# Altium PCB TinyCAN.PcbDoc
Units mil, origin at the board's own origin, x right, y up, seen from the top; angles counter-clockwise.
Board outline 1141.03 x 566.03 mil, 4 copper layers (Top Layer, Layer 1, Layer 2, Bottom Layer), stack 23.756 mil thick; 43 components, 27 nets, 167 pads, 68 vias.
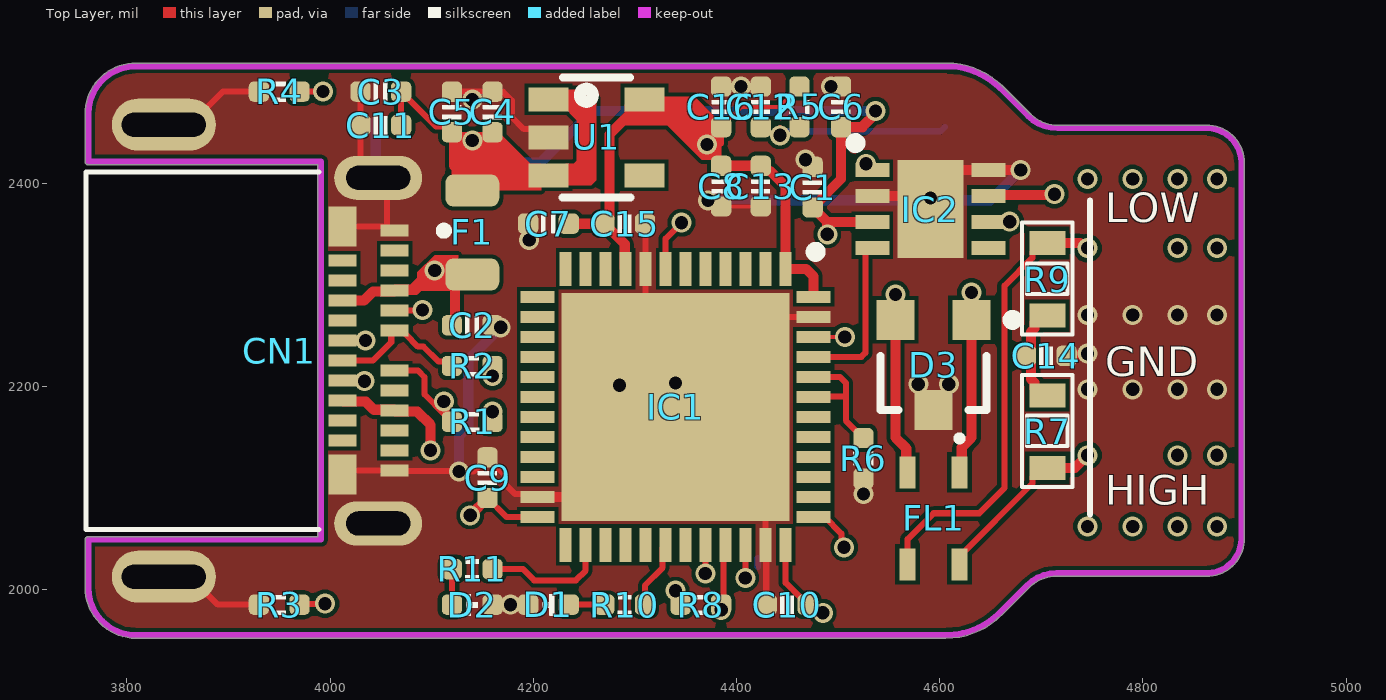
[diagram p0: Top Layer view]
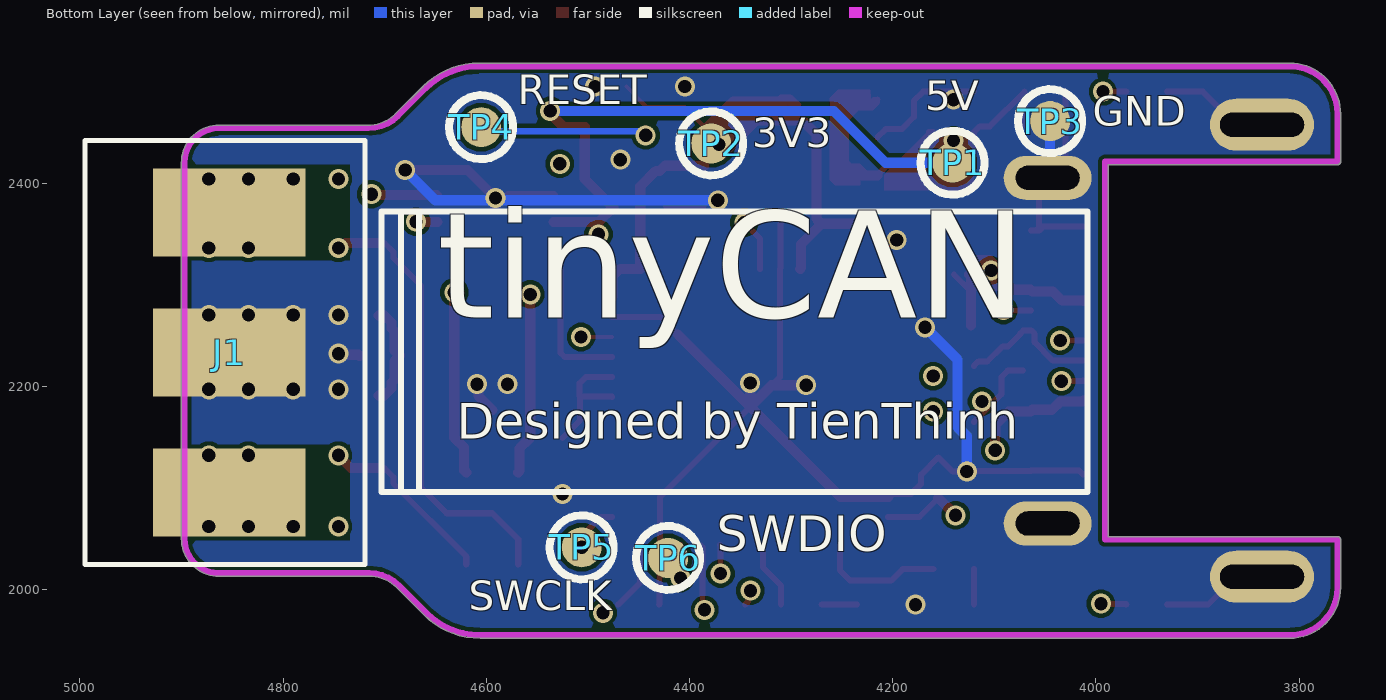
[diagram p1: Bottom Layer view, seen from below]
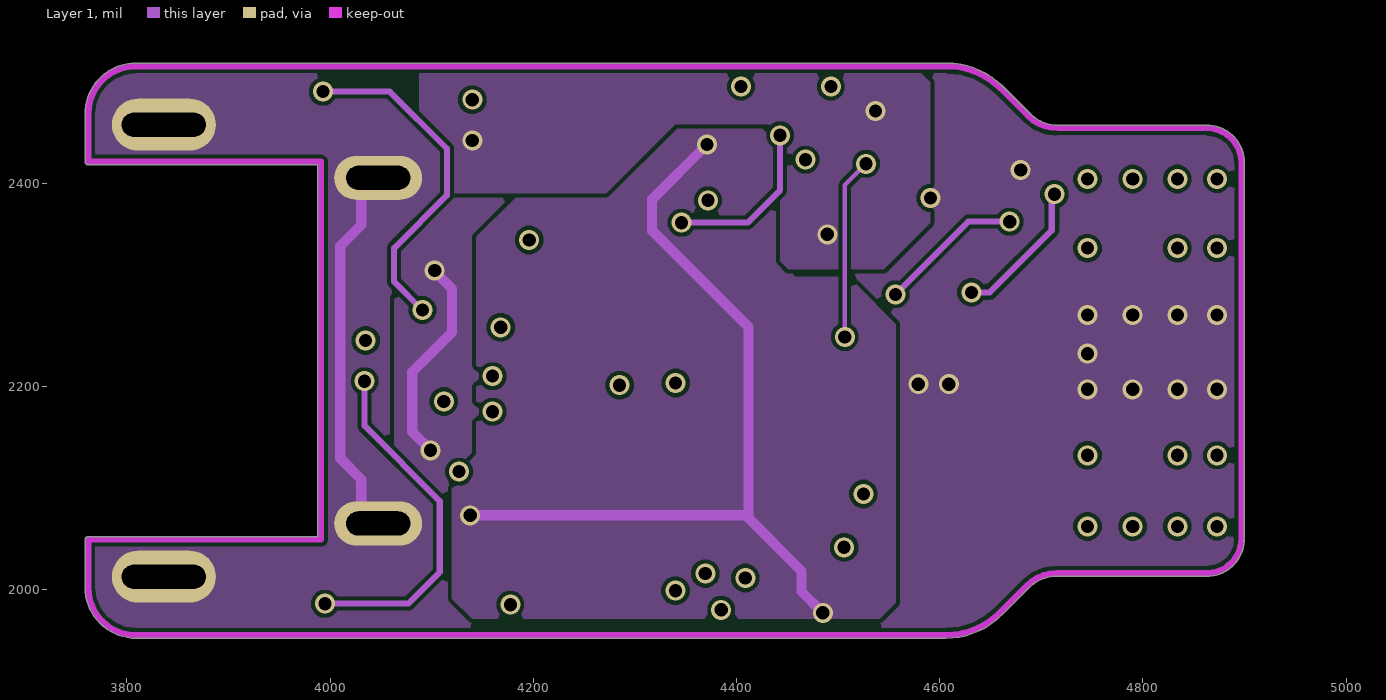
[diagram p2: Layer 1]
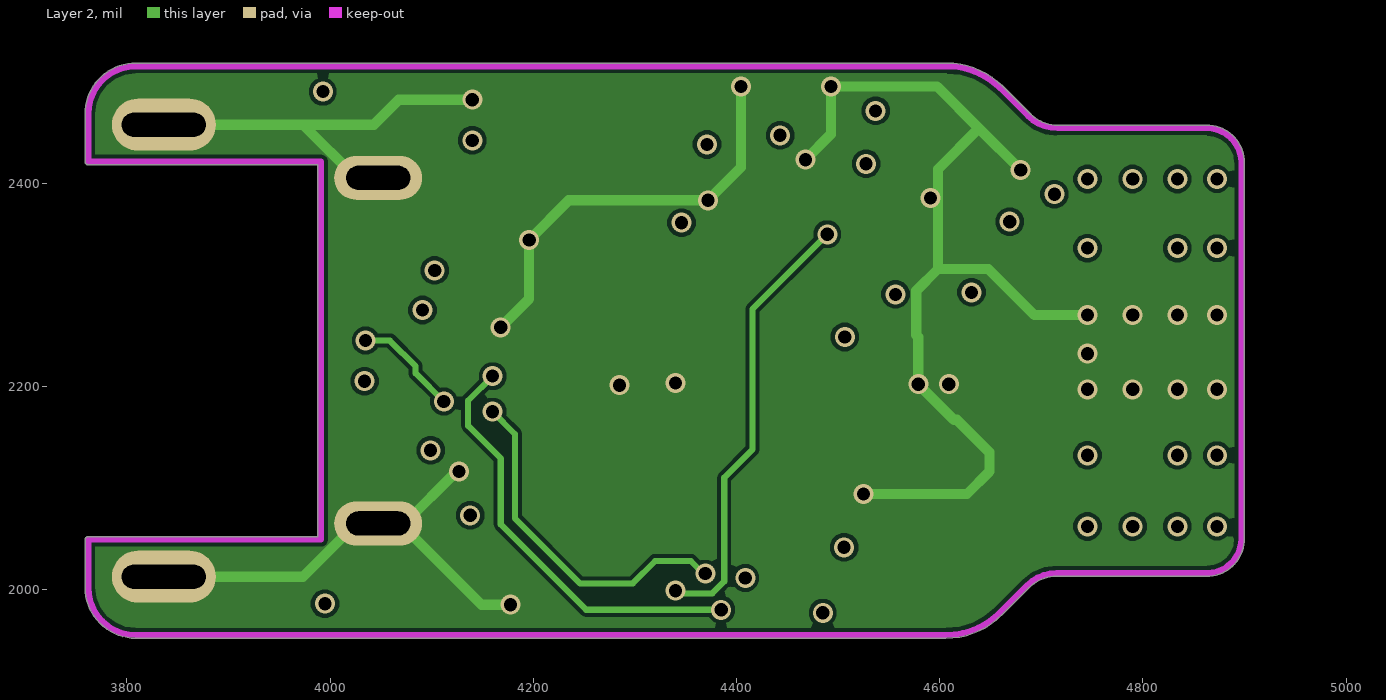
[diagram p3: Layer 2]
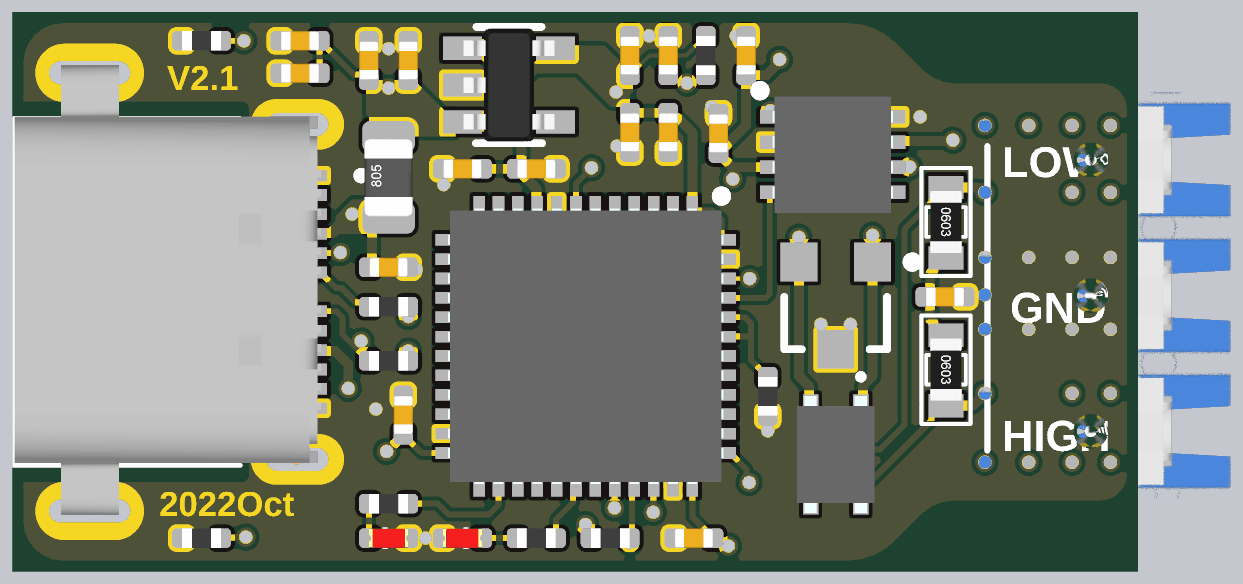
[diagram p4: 3D render of the assembled board from above, using the file's embedded part models]

## Layer stack, top to bottom
Top Solder: solder mask 0.4, Solder Resist, Dk 3.5
Top Layer: signal copper 1.4
Dielectric 2: prepreg 2.8, PP-006, Dk 4.1
Layer 1: signal copper 1.378
Dielectric 1: dielectric 12.6, FR-4, Dk 4.8
Layer 2: signal copper 1.378
Dielectric 3: prepreg 2.8, PP-006, Dk 4.1
Bottom Layer: signal copper 1.4
Bottom Solder: solder mask 0.4, Solder Resist, Dk 3.5

## Board outline
3758.99,2002 ccw(c3809,2002) 3808.97,1951.98 3827,1951.98 3809,1951.98 4606,1951.98 ccw(c4606,2029.84) 4661.05,1974.79 4688.13,2001.87 cw(c4714.97,1975.03) 4714.97,2012.98 4863,2012.98 ccw(c4863,2050) 4900.02,2050 4900.02,2420 ccw(c4863,2420) 4863,2457.01 4715.97,2457.01 cw(c4715.97,2494.97) 4689.13,2468.13 4662.05,2495.21 ccw(c4607,2440.16) 4607,2518.01 3827.02,2518.01 3809,2518.01 ccw(c3809,2468) 3758.99,2468 3758.99,2421 ccw(c3762,2421) 3762,2417.99 3987.99,2417.99 3987.99,2052.01 3762,2052.01 ccw(c3762,2049) 3758.99,2049

## Design rules (kind name [scope] priority, off if disabled: settings)
Clearance [All] p1: gap=4 ignorepadtopadclearanceinfootprint=FALSE
PlaneConnect [All] p1: planeconnectstyle=Direct reliefexpansion=20 reliefentries=4 reliefconductorwidth=10 reliefairgap=10
PolygonConnect [All] p1: connectstyle=Direct reliefconductorwidth=10 reliefentries=4 polygonreliefangle="90 Angle" airgapwidth=10
RoutingVias [All] p1: holewidth=12.99 width=19.68 viastyle="Through Hole" minholewidth=12.99 minwidth=19.68 maxholewidth=12.99 maxwidth=19.68
SolderMaskExpansion [All] p1: expansion=4 istentingtop=FALSE
Width [All] p1: maxlimit=10 minlimit=4 preferedwidth=6
29 further rules are at their usual default settings.

## Classes and differential pairs
component class TinyCAN: C1 C2 C3 C4 C5 C6 C7 C8 C9 C10 C16 CN1 D1 F1 FL1 IC1 IC2 J1 R1 R2 R3 R4 R5 R6 R7 R8 R9 R10 R11 TP1 TP2 TP3 TP4 TP5 U1

## Components (designator, comment, footprint, x,y, rotation, side; value= is the part's Value field where it differs from the comment)
C1 "104" CAP_0402 4475,2396 r90 top value=103
C2 "104" CAP_0402 4140,2260 r0 top value=103
C3 "105" CAP_0402 4050,2490 r0 top value=103
C4 "105" CAP_0402 4160,2470 r270 top value=103
C5 "105" CAP_0402 4120,2470 r270 top value=103
C6 "105" CAP_0402 4503,2475 r270 top value=103
C7 "105" CAP_0402 4215,2360 r0 top value=103
C8 "105" CAP_0402 4385,2397 r90 top value=103
C9 "104" CAP_0402 4155,2110 r90 top value=103
C10 "104" CAP_0402 4450,1985 r180 top value=103
C11 "104" CAP_0402 4050,2457 r180 top value=103
C12 "104" CAP_0402 4424,2475 r90 top value=103
C13 "104" CAP_0402 4424,2397 r270 top value=103
C14 "4.7nF" CAP_0402 4705,2230 r180 top value=103
C15 "104" CAP_0402 4290,2360 r0 top value=103
C16 "104" CAP_0402 4385,2475 r90 top value=103
CN1 "USB CONT" MOLEX_1054550101 3950,2235 r270 top locked
D1 "color?" LED_0402_RED 4215,1985 r180 top
D2 "color?" LED_0402_RED 4140,1985 r0 top
D3 "PESD1CAN,215" SOT23-3 4594,2221 r180 top
F1 "Fuse" RES-SMD-0805-Clean 4140,2355 r90 top
FL1 "ACM2520-301" ACM25203012P 4594,2070 r270 top
IC1 "STM32F072CBU6" QFN50P700X700X60-49N-D 4340.17,2179.73 r270 top
IC2 "TJA1044VTKZ" SON65P300X300X100-9N 4590.91,2374.39 r0 top
J1 "KF3" KF3-3.5 4853,2233.2 r270 bottom
R1 "22R" RES_0402 4140,2165 r0 top
R2 "22R" RES_0402 4140,2220 r0 top
R3 "5K1" RES_0402 3950,1985 r180 top
R4 "5K1" RES_0402 3950,2490 r180 top
R5 "10k" RES_0402 4462,2475 r270 top
R6 "10k" RES_0402 4525,2129 r270 top
R7 "60R" RES-SMD-0603 4706,2156 r270 top
R8 "10k" RES_0402 4365,1985 r180 top
R9 "60R" RES-SMD-0603 4706,2306 r270 top
R10 "1K" RES_0402 4290,1985 r180 top
R11 "1K" RES_0402 4140,2020 r180 top
TP1 "TP 1mm" "SMT Test Point" 4141,2420 r90 bottom
TP2 "TP 1mm" "SMT Test Point" 4378.5,2439 r90 bottom
TP3 "TP 1mm" "SMT Test Point" 4045,2461 r90 bottom
TP4 "TP 1mm" "SMT Test Point" 4605,2455 r90 bottom
TP5 "TP 1mm" "SMT Test Point" 4506,2041.46 r90 bottom
TP6 "TP 1mm" "SMT Test Point" 4421,2031 r90 bottom
U1 "XC6209F332" SOT23-5 4262.24,2445 r270 top

## Footprints (in the part's own frame and the unit in brackets; to place one, negate y for a bottom-side part, rotate by r counter-clockwise, add the part's x,y. Pads: shape width x height; smd on the part's side, far side on the other; paste and mask are expansions set on the pad)
ACM25203012P [mm]
  rect 0.8x0.4 smd: 1(-1.15,0.65) 2(-1.15,-0.65) 3(1.15,-0.65) 4(1.15,0.65)
  silkscreen extent -2.05,0.6 -1.95,0.7, body extent -1.51,-1 1.51,1, height 1.4
CAP_0402 [mil]
  rrect50% 20x20 smd: 1(-20,0) 2(20,0)
  silkscreen extent -7,-9 7,9, body extent -20,-10 20,10, height 20
KF3-3.5 [mm] "3,50mm - modular - blue - Horizontal wire entry - Pressure clamp - 8,4mm height - 03p"
  rect 2.2x3.81 smd: 1(-3.5,0) 2(0,0) 3(3.5,0)
  silkscreen extent -5.3,-3.6 5.3,3.4, body extent -5.7,-3.6 5.8,3.4, height 8.41
LED_0402_RED [mil]
  rrect50% 20x20 smd: 1(-20,0) 2(20,0)
  silkscreen extent -6,-10 6,10, body extent -20,-10 20,10, height 18
MOLEX_1054550101 [mm]
  rect 0.3x0.7 smd: A1(-3,2.885) A2(-2.5,2.885) A3(-2,2.885) A4(-1.5,2.885) A5(-1,2.885) A6(-0.5,2.885) A7(0.5,2.885) A8(1,2.885) A9(1.5,2.885) A10(2,2.885) A11(2.5,2.885) A12(3,2.885) B2(2.25,1.585) B3(1.75,1.585) B4(1.25,1.585) B5(0.75,1.585) B6(0.25,1.585) B7(-0.25,1.585) B8(-0.75,1.585) B9(-1.25,1.585) B10(-1.75,1.585) B11(-2.25,1.585)
  rect 1x0.7 smd: B1(3.1,1.585) B12(-3.1,1.585)
  oval 1.1x2.2 hole 0.6 slot 1.6 at 90 deg: S1(-4.32,2.475) S2(4.32,2.475)
  oval 1.3x2.6 hole 0.6 slot 2.1 at 90 deg: S3(-5.65,-2.885) S4(5.65,-2.885)
  silkscreen extent -4.47,-4.83 4.47,4.22, body extent -5.85,-4.82 5.75,3.08, height 2.22
QFN50P700X700X60-49N-D [mm]
  rect 0.85x0.3 smd: 1(-3.45,2.75) 2(-3.45,2.25) 3(-3.45,1.75) 4(-3.45,1.25) 5(-3.45,0.75) 6(-3.45,0.25) 7(-3.45,-0.25) 8(-3.45,-0.75) 9(-3.45,-1.25) 10(-3.45,-1.75) 11(-3.45,-2.25) 12(-3.45,-2.75) 25(3.45,-2.75) 26(3.45,-2.25) 27(3.45,-1.75) 28(3.45,-1.25) 29(3.45,-0.75) 30(3.45,-0.25) 31(3.45,0.25) 32(3.45,0.75) 33(3.45,1.25) 34(3.45,1.75) 35(3.45,2.25) 36(3.45,2.75)
  rect 0.3x0.85 smd: 13(-2.75,-3.45) 14(-2.25,-3.45) 15(-1.75,-3.45) 16(-1.25,-3.45) 17(-0.75,-3.45) 18(-0.25,-3.45) 19(0.25,-3.45) 20(0.75,-3.45) 21(1.25,-3.45) 22(1.75,-3.45) 23(2.25,-3.45) 24(2.75,-3.45) 37(2.75,3.45) 38(2.25,3.45) 39(1.75,3.45) 40(1.25,3.45) 41(0.75,3.45) 42(0.25,3.45) 43(-0.25,3.45) 44(-0.75,3.45) 45(-1.25,3.45) 46(-1.75,3.45) 47(-2.25,3.45) 48(-2.75,3.45)
  rect 5.7x5.7 smd: 49(0,0)
  silkscreen extent -4,3.38 -3.75,3.63, body extent -3.55,-3.55 3.55,3.55, height 0.6
RES-SMD-0603 [mm]
  rect 0.6x0.9 smd: 1(-0.889,0) 2(0.927,0)
  silkscreen extent -1.4,-0.64 1.4,0.64, body extent -0.8,-0.4 0.8,0.4, height 0.43
RES-SMD-0805-Clean [mm]
  rrect50% 0.8x1.35 smd: 1(-1.143,0) 2(0.957,0)
  body extent -1.1,-0.62 0.9,0.63, height 0.8
RES_0402 [mil]
  rrect50% 20x20 smd: 1(-20,0) 2(20,0)
  silkscreen extent -6,-10 6,10, body extent -20,-10 20,10, height 14
"SMT Test Point" [mm]
  round 1 smd paste-0.5: 1(0,0)
  silkscreen extent -0.8,-0.8 0.8,0.8, body extent -0.5,-0.5 0.5,0.5, height 0.1
SON65P300X300X100-9N [mm]
  rect 0.85x0.35 smd: 1(-1.45,0.975) 2(-1.45,0.325) 3(-1.45,-0.325) 4(-1.45,-0.975) 5(1.45,-0.975) 6(1.45,-0.325) 7(1.45,0.325) 8(1.45,0.975)
  rect 1.65x2.45 smd: 9(0,0)
  silkscreen extent -2,1.53 -1.75,1.77, body extent -1.55,-1.5 1.55,1.5, height 1
SOT23-3 [mm]
  rect 0.95x1 smd: 1(-0.95,-1.125) 2(0.95,-1.125) 3(0,1.125)
  silkscreen extent -2.1,-1.25 1.32,1.13, body extent -1.45,-0.65 1.45,0.65, height 1
SOT23-5 [mm]
  rect 0.6x1 smd: 1(-0.95,-1.2) 2(0,-1.2) 3(0.95,-1.2) 4(0.95,1.2) 5(-0.95,1.2)
  silkscreen extent -1.5,-0.85 1.5,0.85, body extent -1.46,-1.17 1.46,1.17, height 1

## Part data
C1 C2 C3 C4 C5 C6 C7 C8 C9 C10 C11 C12 C13 C14 C15 C16: library part CM, "Cap SMD"
CN1: library part 1054550101, "CONN RCP USB3.1 TYPEC 24P SMD RA", Manufacturer=Molex, Package=None, PART NUMBER=WM17904TR-ND, Availability=Unavailable, Gender=Receptacle, MF=Molex, MPN=1054550101, Price=None
D1 D2: library part LED_0402, "LED", Type=0402
D3: library part PESD5V0S2BT,215, "TVS DIODE 5V 14V SOT23", Manufacturer="Nexperia USA Inc.", Created by=eteofilo, Creation date=17-Apr-2018, Manufacturer part #=PESD5V0S2BT,215
F1: library part FUSE
FL1: library part ACM2520-301-2PL-TL01_1, "Common Mode Filters", Arrow Part Number=ACM9070-701-2PL-TL01, Manufacturer_Name=TDK, Mouser Part Number=810-ACM90707012PLTL, Arrow Price/Stock=https://www.arrow.com/en/products/acm9070-701-2pl-tl01/tdk, Datasheet Link=http://www.mouser.com/ds/2/400/e9713_acm-16715.pdf, Height=4.5mm, Manufacturer_Part_Number=ACM9070-701-2PL-TL01, Mouser Price/Stock=https://www.mouser.co.uk/ProductDetail/TDK/ACM9070-701-2PL-TL01?qs=vGA93s6UehfkQlsVzBqdDg%3D%3D
IC1: "Integrated Circuit", Manufacturer_Name=STMicroelectronics, Mouser Part Number=511-STM32F072CBU6, Arrow Part Number=STM32F072CBU6, Arrow Price/Stock=https://www.arrow.com/en/products/stm32f072cbu6/stmicroelectronics, Datasheet Link=https://www.mouser.com/datasheet/2/389/stm32f072c8-956183.pdf, Height=0.6mm, Manufacturer_Part_Number=STM32F072CBU6, Mouser Price/Stock=https://www.mouser.co.uk/ProductDetail/STMicroelectronics/STM32F072CBU6?qs=xf9JV0PLFEfAjCpxuEsnYA%3D%3D
IC2: "Integrated Circuit", Manufacturer_Name=NXP, Mouser Part Number=771-TJA1044VTKZ, Arrow Part Number=TJA1044VTKZ, Arrow Price/Stock=https://www.arrow.com/en/products/tja1044vtkz/nxp-semiconductors?region=nac, Datasheet Link=http://www.nxp.com/docs/en/data-sheet/TJA1044V.pdf, Height=1mm, Manufacturer_Part_Number=TJA1044VTKZ, Mouser Price/Stock=https://www.mouser.co.uk/ProductDetail/NXP-Semiconductors/TJA1044VTKZ?qs=wUXugUrL1qx6DvcsX%252BFKdw%3D%3D
J1: Manufacturer="Würth Elektronik eiSos GmbH", partNo=691103110003, ComponentLink1 Description=Manufacturer, ComponentLink1URL=http://www.we-online.com, ComponentLink2 Description=Datasheet, ComponentLink2URL=http://katalog.we-online.de/em/datasheet/6911031100xx.pdf, Created by="Karrer Zheng", Created Date="29 October 2013", NoPins=3
R1 R2 R3 R4 R5 R6 R7 R8 R9 R10 R11: library part R, "Resistor R1/4W"
TP1 TP2 TP3 TP4 TP5 TP6: "PCB TEST POINT SMT 1mm", Created by=gmoreno, Creation date=26-Apr-2012
U1: library part XC6209F332MR-G, "IC REG LINEAR 3.3V 300MA SOT25", MFR="Torex Semiconductor Ltd", Category=IC, ComponentLink1Description="Manufacturer URL", ComponentLink1URL=http://www.ti.com/, ComponentLink2Description=Datasheet, ComponentLink2URL=http://www.ti.com/general/docs/lit/getliterature.tsp?genericPartNumber=TLV70233&fileType=pdf, ComponentLink3Description="Package Specification", ComponentLink3URL=http://www.ti.com/litv/pdf/mpds018i, MPN=XC6209F332MR-G, PinCount=5, Solder=SMT

## Via types
v1: diameter 19.68, hole 12.99, Top Layer to Bottom Layer, tented both sides, 68 vias

## Nets (pads, with @x,y where several pads share a name; then routed paths per layer and width w, separated by ;. In a path a pad name is that pad's centre, name@x,y a point inside that pad or via, vN(x,y) a via of type N, cw(c..) or ccw(c..) an arc to the next point about the centre after c; other vN are vias at no path point)
CANH: FL1.4 J1.3 R7.2 | length 178.7
  Top Layer w6: FL1.4 4619.59,2032.6 4691.29,2104.3 4691.29,2110.7 4700.1,2119.51 R7.2
  Top Layer w10: R7.2 4733.01,2119.51 v1(4745.51,2132.01)
  other v1: 4745.51,2062.01 4790,2062.01 4834,2062.01 4873,2062.01 4834,2132.01 4873,2132.01
CANL: FL1.3 J1.1 R9.1 | length 446.7
  Top Layer w6: FL1.3 4568.41,2049.41 4594,2075 4639,2075 4664,2100 4664,2299 4691.28,2326.29 4691.28,2332.19 4700.09,2341 R9.1
  Top Layer w10: R9.1 4737.88,2341 4742.89,2336 v1(4745.51,2336) ; v1@4746.94,2337.44 v1@4748.38,2336
  other v1: 4834,2336 4873,2336 4745.51,2404.01 4790,2404.01 4834,2404.01 4873,2404.01
GND: C1.2 C2.2 C3.1 C4.1 C5.1 C6.1 C7.1 C8.1 C9.2 C10.2 C11.2 C12.2 C13.2 C14.1 C15.2 C16.2 CN1.A1 CN1.A12 CN1.B1 CN1.B12 CN1.S1 CN1.S2 CN1.S3 CN1.S4 D1.2 D2.2 D3.3 IC1.8 IC1.23 IC1.35 IC1.47 IC1.49 IC2.2 IC2.8 IC2.9 J1.2 R3.2 R4.2 R6.2 TP3.1 U1.2 | length 5059.9
  Top Layer w4: C8.1 C13.2 ; IC2.9@4578.12,2387.18 4589.02,2387.18 v1(4590.91,2385.29)
  Top Layer w6: CN1.S4 3862.01,2012.56 3889.57,1985 R3.2 ; CN1.S3 3862.01,2457.44 3894.57,2490 R4.2 ; CN1.B1 4016.34,2116.89 CN1.A12 4064.03,2116.44 4126.56,2116.44 v1(4127,2116) 4141,2116 C9.2 4172,2113 4172,2104 4181.94,2094.06 4201.44,2094.06 IC1.23 ; CN1.B12 4051.77,2357.05 4055.71,2353.11 CN1.A1@4058.88,2353.11 ; C3.1 C11.2 4030,2422.31 4047.23,2405.08 CN1.S1 4055.98,2396.54 4055.98,2356.02 CN1.A1@4058.88,2353.11 ; CN1.A1 CN1.A1@4058.88,2353.11 ; C5.1 v1@4140,2490 ; v1(4140,2482) v1@4140,2490 ; U1.2 4206.89,2453.11 4190.89,2453.11 4179,2465 4179,2481 4170,2490 C4.1 v1@4140,2490 ; C15.2 4310.32,2359.68 4310.32,2315.88 IC1.8 4310.65,2209.26 IC1.49@4318.91,2201 ; IC1.49 4428.76,2091.15 IC1.35 4429.38,2043.28 4429.38,1985.62 C10.2 ; IC1.49@4411.22,2250.78 4428.76,2268.32 IC1.47
  Top Layer w10: IC1.23 4251.59,2091.15 IC1.49 ; v1(4285,2201) 4318.91,2201 IC1.49 ; v1(4340.17,2203.17) IC1.49 ; IC1.49@4411.22,2250.78 IC1.49 ; IC2.2 IC2.9@4578.12,2387.18 ; IC2.9 v1(4590.91,2385.29) 4618.39,2412.77 IC2.8 v1(4679.77,2412.77) ; D3.3 4607.7,2190.41 4607.7,2200.7 v1(4609,2202) ; C14.1 4726,2231 4745,2231 v1@4746,2232
  Layer 1 w10: CN1.S2 4046.17,2064.92 4030.79,2080.31 4030.79,2108.21 4010,2129 4010,2338 4030.79,2358.79 4030.79,2389.69 4046.17,2405.08 CN1.S1
  Layer 2 w10: CN1.S4 3973.43,2012.56 4025.79,2064.92 CN1.S2 CN1.S2@4069.09,2064.92 ; CN1.S3 3973.43,2457.44 ; CN1.S1 4025.79,2405.08 3973.43,2457.44 ; v1(4127,2116) 4124.38,2116 4073.3,2064.92 CN1.S2@4069.09,2064.92 ; v1(4140,2482) 4067.68,2482 4043.12,2457.44 3973.43,2457.44 ; v1(4168,2258) 4196,2286 v1(4196,2344) 4235,2383 v1(4372,2383) 4404.5,2415.5 v1(4404.5,2495) ; v1(4177.5,1985) 4149.02,1985 CN1.S2@4069.09,2064.92 ; v1(4468,2423) 4493,2448 v1(4493,2495) 4597.54,2495 4638.66,2453.89 ; v1(4525,2094) 4627,2094 4649,2116 4649,2135 4616.99,2167.01 4613.99,2167.01 v1(4579,2202) 4579,2248.31 4577,2250.31 4577,2294 4598.46,2315.46 ; v1(4679.77,2412.77) 4638.66,2453.89 ; v1(4745.51,2270) 4693.46,2270 4648,2315.46 4598.46,2315.46 ; 4598.46,2315.46 4598.46,2413.69 4638.66,2453.89
  Bottom Layer w10: TP3.1 4045,2407.52 CN1.S1 ; v1(4127,2116) 4127,2150.81 4136,2159.81 4136,2226 v1(4168,2258) ; v1(4372,2383) 4650,2383 v1(4679.77,2412.77)
  other v1: 4745.51,2197.01 4790,2197.01 4834,2197.01 4873,2197.01 4745.51,2232 4790,2270 4834,2270 4873,2270
NetC14_2: C14.2 R7.1 R9.2 | length 102.8
  Top Layer w10: R7.1 4700.09,2191 4693.28,2197.81 4693.28,2203.72 4690,2207 4690,2225 C14.2 4690,2235 4690,2253.51 4693.29,2256.8 4693.29,2262.7 4700.1,2269.51 R9.2
NetCN1_A5: CN1.A5 R4.1 | length 388
  Top Layer w6: R4.1 v1(3993,2490) ; CN1.A5 4063.9,2274.68 4090.68,2274.68 v1(4091,2275)
  Layer 1 w6: v1(3993,2490) 4059,2490 4115,2434 4115,2388 4063,2336 4063,2303 v1(4091,2275)
NetCN1_A6: CN1.A6 CN1.B6 R2.1 | length 139.5
  Top Layer w6: CN1.B6 4042.16,2225.16 4060.29,2243.29 4060.29,2251.78 4063.2,2254.68 4071.46,2254.68 4074.36,2251.78 4074.36,2251.21 4086.57,2239 4092,2239 4106.6,2224.4 4115.6,2224.4 R2.1
NetCN1_A7: CN1.A7 CN1.B7 R1.1 | length 221.1
  Top Layer w6: CN1.B7 4012.48,2244.92 4034.92,2244.92 v1(4035,2245) ; CN1.A7@4071.69,2215.31 4086.69,2215.31 4093,2209 4093,2192 R1.1@4113,2172 ; v1(4112,2185) 4114.62,2182.38 4114.62,2170.38 R1.1
  Layer 2 w6: v1(4035,2245) 4059,2245 4084.19,2219.81 4084.19,2212.81 v1(4112,2185)
NetCN1_B5: CN1.B5 R3.1 | length 391.7
  Top Layer w6: R3.1 3970.5,1985.5 3994.5,1985.5 v1(3995,1986) ; CN1.B5 4012.64,2205.24 4033.76,2205.24 v1(4034,2205)
  Layer 1 w6: v1(3995,1986) 4077,1986 4108,2017 4108,2087 4034,2161 v1(4034,2205)
NetD1_1: D1.1 R10.2 | length 35
  Top Layer w6: D1.1 R10.2
NetD2_1: D2.1 R11.2 | length 35
  Top Layer w6: D2.1 R11.2
NetD3_1: D3.1 FL1.1 IC2.7 | length 388.7
  Top Layer w10: FL1.1 4621.7,2117.39 4621.7,2139.7 4631.4,2149.4 D3.1 v1(4631.4,2292.4) ; IC2.7 4648.91,2388.09 4712.09,2388.09 v1(4713,2389)
  Layer 1 w6: v1(4631.4,2292.4) 4649.4,2292.4 4710.38,2353.38 4710.38,2386.38 v1(4713,2389)
NetD3_2: D3.2 FL1.2 IC2.6 | length 343.2
  Top Layer w10: v1(4556.6,2290.4) D3.2 4556.6,2149.4 4567.15,2138.85 4567.15,2116.54 FL1.2 ; IC2.6 4648.2,2361.8 4668.8,2361.8 v1(4669,2362)
  Layer 1 w6: v1(4556.6,2290.4) 4628.2,2362 v1(4669,2362)
NetIC1_26: IC1.26 R11.1 | length 125.4
  Top Layer w6: R11.1 4190,2020 4201,2009 4242,2009 4251.59,2018.59 IC1.26
NetIC1_30: IC1.30 R10.1 | length 67.3
  Top Layer w6: R10.1 4310,2004 4327.43,2021.43 4327.43,2041 IC1.30
NetIC1_43: IC1.43 IC1.44 R6.1 | length 127.7
  Top Layer w6: IC1.43 4476.21,2189.79 4507.79,2189.79 ; IC1.44 4501.74,2209.26 4508,2203 4508,2190 4507.79,2189.79 ; R6.1 4507.79,2166.21 4507.79,2189.79
ST_XIN: IC1.5
ST_XOUT: IC1.6
STM32_CAN_RX: IC1.45 IC2.4 | length 160.2
  Top Layer w6: IC1.45 4522.94,2228.94 4527,2233 4527,2332.11 4530.89,2336 IC2.4
STM32_CAN_TX: IC1.46 IC2.1 | length 220.6
  Top Layer w4: IC1.46 4476.05,2248.58 4506.58,2248.58 v1(4506.63,2248.53) v1@4508,2249.9 ; v1(4527.6,2419) IC2.1
  Layer 1 w4: v1(4506.63,2248.53) 4506.63,2398.03 v1(4527.6,2419)
STM32_RESET: C12.1 IC1.7 R5.2 TP4.1 | length 389.5
  Top Layer w4: v1(4443,2447) v1@4443,2455
  Top Layer w6: IC1.7 4330.33,2345.33 v1(4346,2361)
  Layer 1 w6: v1(4346,2361) 4411,2361 4443,2393 v1(4443,2447)
  Bottom Layer w6: v1(4443,2447) 4446.7,2447 4450.7,2451 4601,2451 TP4.1
STM32_SWCLK: IC1.37 TP5.1 | length 48.8
  Top Layer w6: IC1.37 4486.83,2071.46 4503.38,2054.91 4503.38,2044.08 v1(4506,2041.46)
STM32_SWDIO: IC1.34 TP6.1 | length 45.4
  Top Layer w6: v1(4408.74,2011.26) 4408.91,2011.43 4408.91,2043.74 IC1.34
  Bottom Layer w6: v1(4408.74,2011.26) v1@4408.74,2014.96 ; TP6.1@4421,2022.07 TP6.1
TYPEC_VUSB: C2.1 CN1.A4 CN1.A9 CN1.B4 CN1.B9 F1.1 | length 561.3
  Top Layer w6: CN1.A4 4083.05,2294.05 4083.96,2294.96 v1(4103,2314) ; v1@4103,2310 F1.1@4124.5,2310 ; 4122.99,2293.31 F1.1@4139.68,2310
  Top Layer w10: CN1.B4 4013.31,2184.88 4035.12,2184.88 4043.15,2176.85 4062.68,2176.85 CN1.A9 4064.49,2175.04 4085.96,2175.04 4099,2162 v1(4099,2137) ; CN1.B9 4012.45,2284.26 4033.26,2284.26 4042.15,2293.15 4062.68,2293.15 CN1.A4 4064.49,2294.96 4083.96,2294.96 4093.03,2304.03 ; C2.1@4122.99,2260 4122.99,2293.31 4122.99,2308.5 F1.1@4124.5,2310
  Layer 1 w10: v1(4099,2137) 4081,2155 4081,2214 4120,2253 4120,2295.87 4103,2312.87 v1(4103,2314)
USB_CAN_DM: IC1.32 R1.2 | length 370.6
  Top Layer w6: v1(4369.37,2015.63) 4369.54,2015.8 4369.54,2043.74 IC1.32
  Layer 2 w6: v1(4160,2175) 4182,2153 4182,2070 4246,2006 4298,2006 4320,2028 4355.09,2028 4367.46,2015.63 v1(4369.37,2015.63)
USB_CAN_DP: IC1.33 R2.2 R8.1 | length 486.7
  Top Layer w6: v1(4385,1980) 4387.19,1982.19 4387.19,2041.71 IC1.33
  Layer 2 w6: v1(4160,2210) 4136,2186 4136,2161 4168,2129 4168,2064 4252,1980 v1(4385,1980)
VCC3V3: C7.2 C8.2 C9.1 C10.1 C13.1 C15.1 C16.1 IC1.1 IC1.9 IC1.24 IC1.36 IC1.48 R5.1 TP2.1 U1.5 | length 1623
  Top Layer w4: C16.1 4405,2475 4442,2475 R5.1
  Top Layer w6: C9.1 4173.54,2071.46 IC1.24 ; U1.5 4357.6,2482.4 C16.1 4385,2439 4372,2439 v1(4371,2438) ; IC1.36 4448.44,2006.56 C10.1
  Top Layer w10: v1(4138,2073) C9.1 ; C7.2 C15.1 ; IC1.9 4290.06,2316.46 4290.06,2339.94 C15.1 ; U1.5 4301.61,2482.4 4294.8,2475.59 4294.8,2467.72 4275,2447.91 4275,2365 C15.1 ; C8.2 C13.1 4429,2412 4433,2412 4448.44,2396.56 IC1.1 4468.44,2315.56 4476,2308 IC1.48
  Layer 1 w10: v1(4138,2073) 4409,2073 4412,2070 ; v1(4371,2438) 4317,2384 4317,2353 4412,2258 4412,2070 ; v1(4485,1977) 4464,1998 4464,2018 4412,2070
VCC5V: C1.1 C3.2 C4.2 C5.2 C6.2 C11.1 F1.2 IC2.3 R8.2 TP1.1 U1.1 U1.3 | length 1506.1
  Top Layer w6: C11.1 C3.2 4104.23,2455.77 4114.23,2455.77 C5.2 ; F1.2@4140,2400 4136.69,2400 4120,2416.69 C5.2 ; U1.3 4206.19,2416.41 4193.59,2416.41 4164,2446 4164,2450 C4.2 4154.62,2444.62 4142.62,2444.62 v1(4140,2442) 4137.38,2444.62 4125.38,2444.62 C5.2 ; U1.1 U1.1@4217.57,2479.83 ; v1(4340,1998.79) 4342.5,1996.29 4342.5,1987.5 R8.2
  Top Layer w10: U1.3 4249.14,2407.6 4255,2413.46 4255,2470.56 4249.14,2476.41 4220.99,2476.41 U1.1@4217.57,2479.83 ; v1(4489.41,2349.59) 4489.41,2361.59 ; IC2.3 4489.41,2361.59 ; v1(4537,2471) 4537,2468.38 4524,2455.38 4524,2455 C6.2 4503,2404 C1.1 4489.41,2361.59
  Layer 2 w6: v1(4340,1998.79) 4342.62,1996.17 4376.17,1996.17 4388,2008 4388,2110 4416,2138 4416,2276.18 v1(4489.41,2349.59)
  Bottom Layer w10: TP1.1 4207,2420 4258,2471 v1(4537,2471)
pads on no net: CN1.A2 CN1.A3 CN1.A8 CN1.A10 CN1.A11 CN1.B2 CN1.B3 CN1.B8 CN1.B10 CN1.B11 IC1.2 IC1.3 IC1.4 IC1.10 IC1.11 IC1.12 IC1.13 IC1.14 IC1.15 IC1.16 IC1.17 IC1.18 IC1.19 IC1.20 IC1.21 IC1.22 IC1.25 IC1.27 IC1.28 IC1.29 IC1.31 IC1.38 IC1.39 IC1.40 IC1.41 IC1.42 IC2.5 U1.4

## Polygon pours and split planes (outlines as drawn)
GND on Layer 1 "GND_L02_P004" (solid, remove dead copper, pour order 4): 3651,2665 3651,1979 3813,1817 5031,1817 5031,2543 5045,2557
TYPEC_VUSB on Layer 1 "TYPEC_VUSB_L02_P003" (solid, pour order 3): 4122.14,2390 4063,2330.86 4063,2132 4108,2087 4110,2089 4152,2089 4152,2317 4204,2369 4204,2409
VCC3V3 on Layer 1 "VCC3V3_L02_P002" (solid, pour order 2): 4340,2458 4272,2390 4187,2390 4144,2347 4144,2133 4120,2109 4120,1991 4140,1971 4541,1971 4557,1987 4557,2261 4510,2308 4457,2308 4457,2309 4443,2323 4443,2447 4432,2458
VCC5V on Layer 1 "VCC5V_L02_P001" (solid, pour order 1): 4088,2518 4088,2390 4272,2390 4340,2458 4432,2458 4443,2447 4443,2323 4451,2315 4545,2315 4590.91,2360.91 4590.91,2499.09 4570,2520
GND on Layer 2 "GND_L03_P005" (solid, remove dead copper, pour order 5): 3740,2736 3697,2693 3697,1993 3707,1993 3892,1808 3976,1892 4945,1892 4945,2560 4988,2603
GND on Bottom Layer "GND_L04_P006" (solid, remove dead copper, pour order 6): 3743,2665 3700,2622 3700,1911 4075,1911 4207,1779 4345,1917 5015,1917 5015,2508 5007,2516
GND on Top Layer "GND_L01_P000" (solid, remove dead copper, pour order 0): 3703,2576 3705,2574 3705,1871 5035,1871 5071,1907 5063,1915 5063,2568

## Keep-outs
Keep-Out Layer:
  lines w6: 3827,1955 3809,1955 ; 3827,2515 3809,2515 ; 4852,2454 4863,2454 cw(c4863,2420) 4897,2420 4897,2050 cw(c4863,2050) 4863,2016 4736,2016 4714.97,2016 ccw(c4714.97,1975.03) 4686,2004 4658.92,1976.92 cw(c4606,2029.84) 4606,1955 3809,1955 ; 4857.5,2454 4737,2454 4715.97,2454 cw(c4715.97,2494.97) 4687,2466 4659.92,2493.08 ccw(c4607,2440.16) 4607,2515 3809,2515 ; 3809,1955 cw(c3809,2002) 3762,2002 3762,2049 3991,2049 3991,2421 3762,2421 3762,2468 cw(c3809,2468) 3809,2515

## Other copper
Top Layer:
  region net VCC3V3: 4284.9,2457.82 4285.72,2457 4332,2457 4366,2423 4385,2423 4385,2455 4357.6,2482.4 4309.49,2482.4
  region net TYPEC_VUSB: 4126,2329 4103,2329 4086,2312 4086,2307 4073.32,2294.32 4073.32,2294.05 4122.25,2294.05 4122.99,2293.31
  region net VCC5V: 4222,2492 4254,2492 4262,2484 4262,2403 4257,2398 4232,2398 4232,2405 4225,2412 4232,2419 4240,2419 4243,2422 4243,2462 4228.59,2476.41 4220.99,2476.41
  region net VCC5V: 4120,2450 4166.3,2450 4208,2408.3 4208,2393 4136,2393 4131,2388 4120,2399 4120,2433.34

## Silkscreen, mask and mechanical layers (free items; w line width, h text height)
Top Overlay:
  lines w6: 4748,2074 4748,2383
  text "LOW" at 4762.93,2351.6 h50
  text "GND" at 4762.93,2200 h50
  text "HIGH" at 4762.93,2073.6 h50
Bottom Overlay:
  lines w6: 4666,2100 4666,2371 ; 4684,2096 4684,2372 ; 4008,2096 4008,2372 4703,2372 4703,2096 4062.4,2096 4008,2096
  text "RESET" at 4569,2467.6 h50
  text "5V" at 4168,2461.6 h50
  text "GND" at 4003,2446.6 h50
  text "3V3" at 4338,2425.6 h50
  text "tinyCAN" at 4648,2232.99 h180
  text "Designed by TienThinh" at 4629,2136.32 h60
  text "SWDIO" at 4373,2025.72 h60
  text "SWCLK" at 4617,1969.6 h50
Top Solder:
  text "V2.1" at 3915,2440 h40
  text "2022Oct" at 3907,2007.48 h40